# Altium PCB lab1_chernov_usb_i2c.PcbDoc
Units mm, origin at the board's own origin, x right, y up, seen from the top; angles counter-clockwise.
Board outline 48 x 20.07 mm, 4 copper layers (Top Layer, Signal Layer 1, Signal Layer 2, Bottom Layer), stack 1.522 mm thick; 28 components, 27 nets, 91 pads, 53 vias.
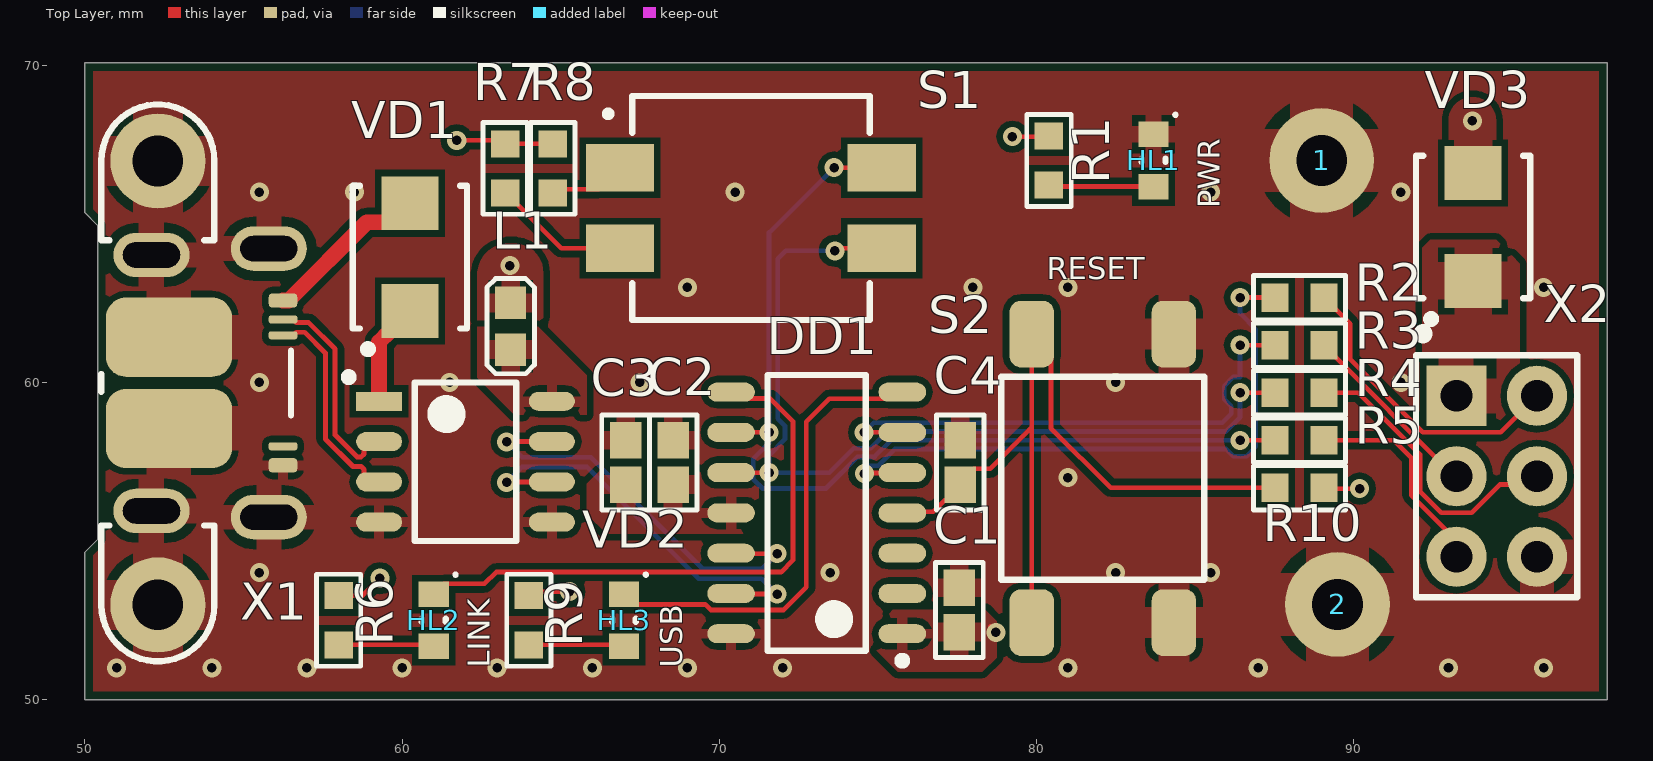
[diagram p0: Top Layer view]
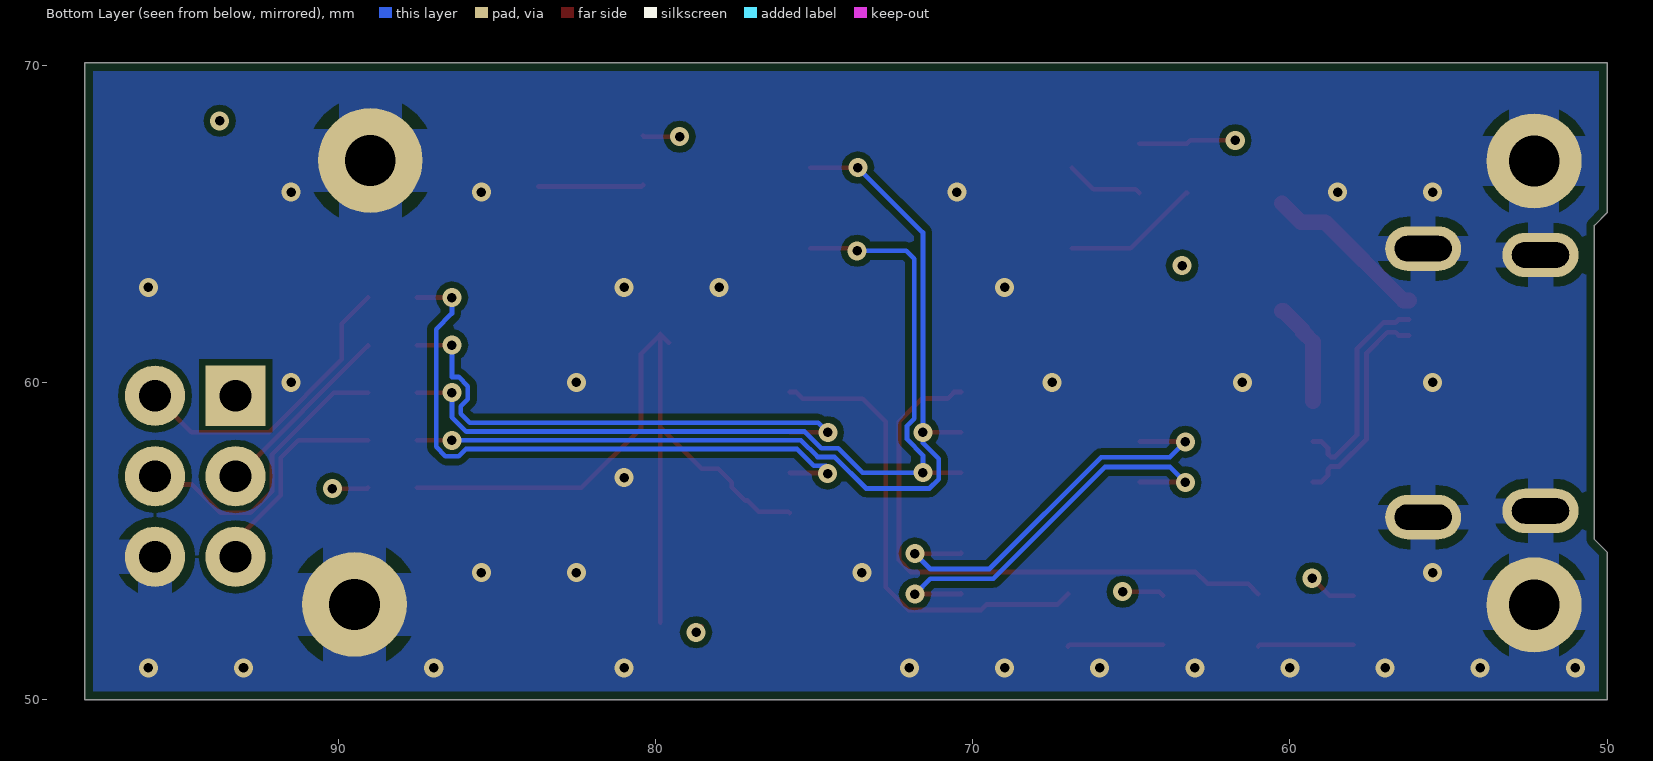
[diagram p1: Bottom Layer view, seen from below]
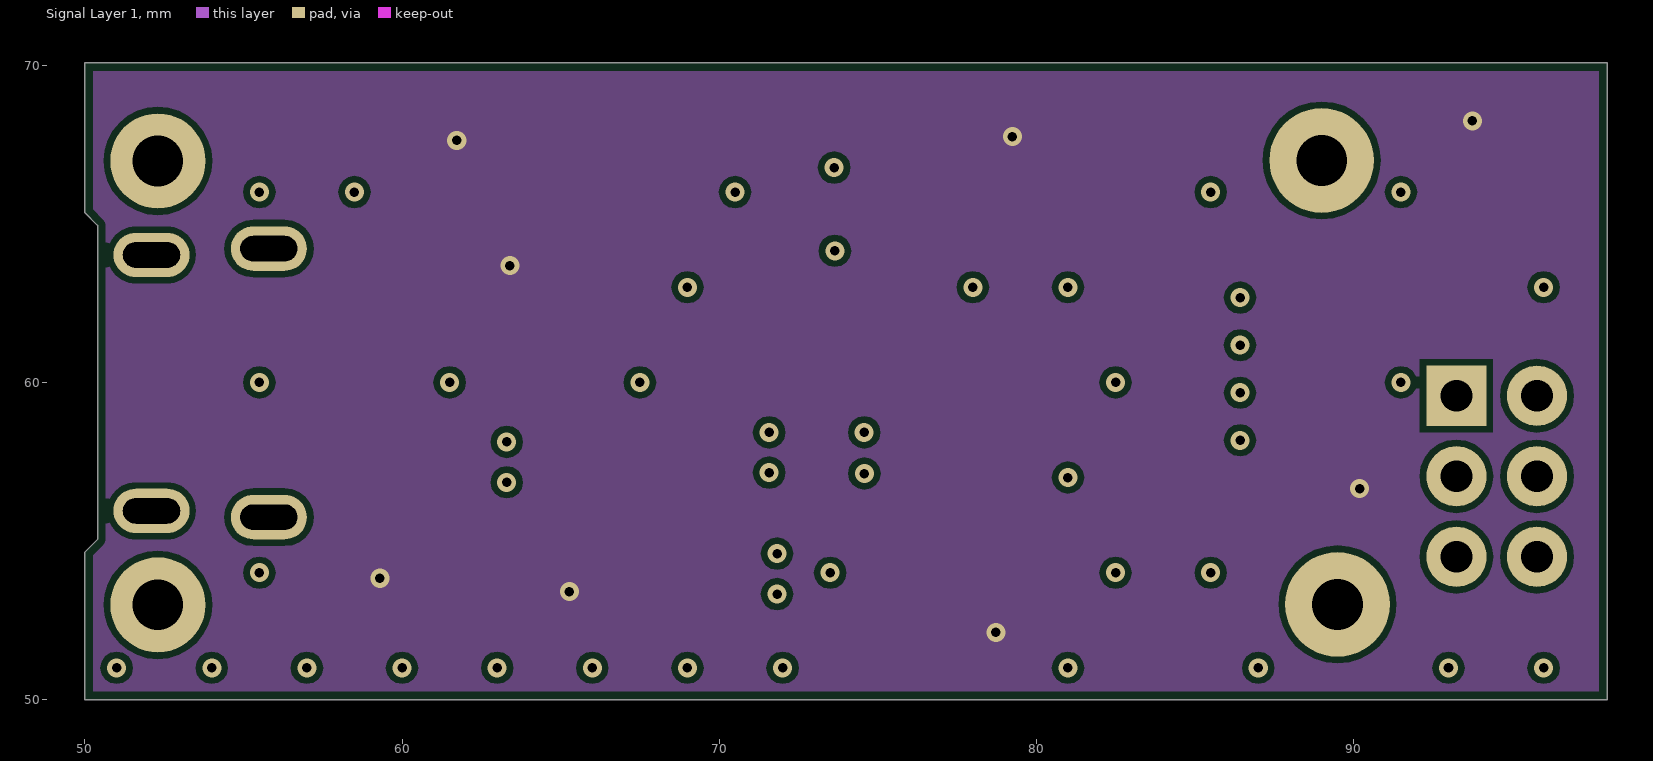
[diagram p2: Signal Layer 1]
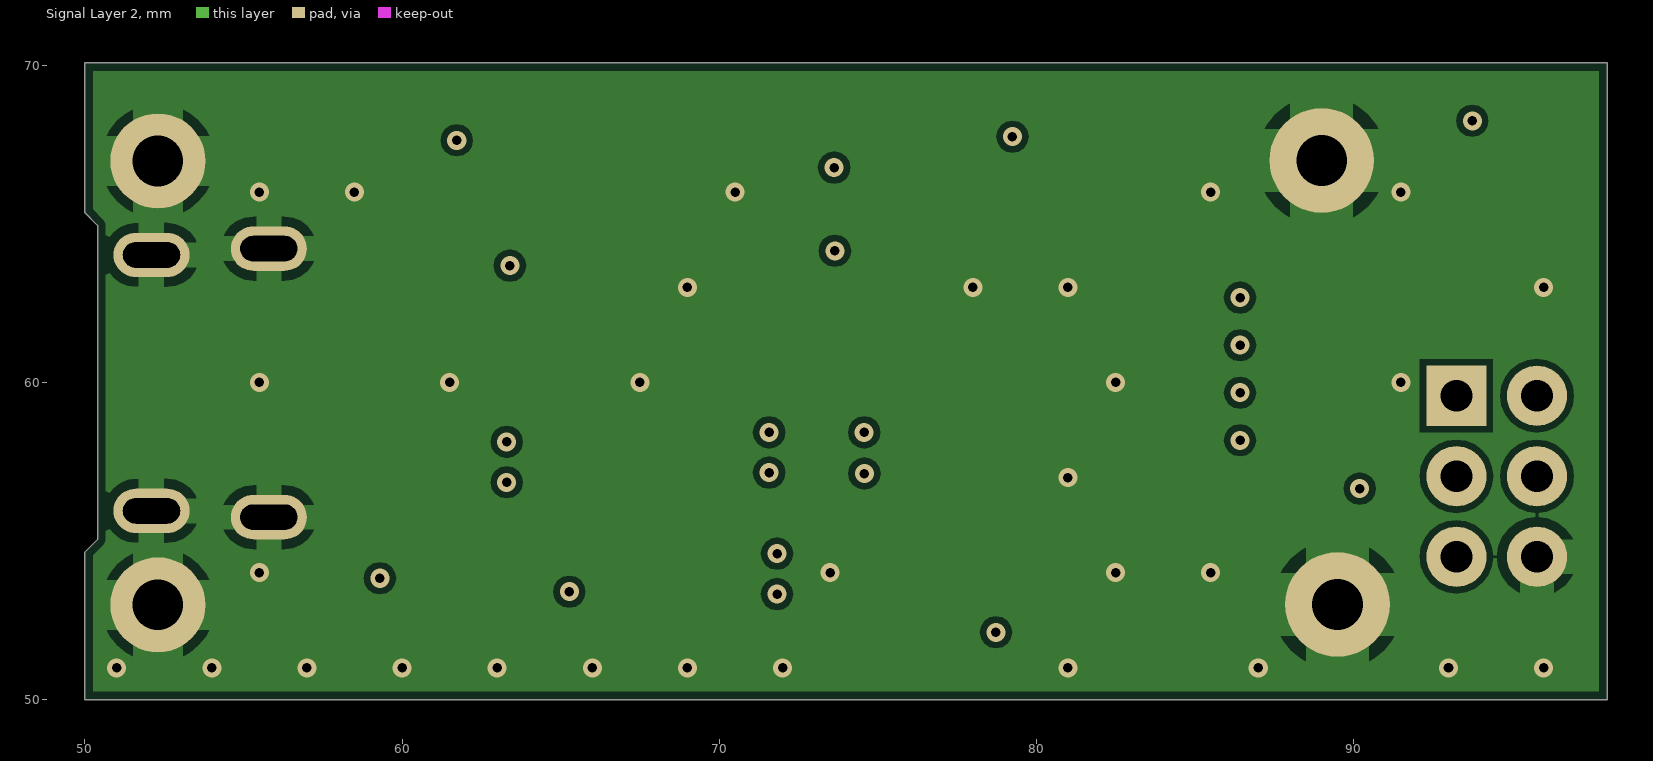
[diagram p3: Signal Layer 2]

## Layer stack, top to bottom
Top Solder: solder mask 0.0102, Solder Resist, Dk 3.5
Top Layer: signal copper 0.018
Prepreg 1: prepreg 0.125, FR4 HiTg170, Dk 5.07
Signal Layer 1: signal copper 0.018
Core 1: core 1.2, FR4, Dk 4.6
Signal Layer 2: signal copper 0.018
Prepreg 2: prepreg 0.125, FR4 HiTg170, Dk 5.07
Bottom Layer: signal copper 0.018
Bottom Solder: solder mask 0.0102, Solder Resist, Dk 3.5

## Board outline
50,54.65 50.4,55.05 50.4,64.95 50,65.35 50,70.075 98,70.075 98,50 50,50

## Design rules (kind name [scope] priority, off if disabled: settings)
AcuteAngle min_acute_angle [OnCopper] p1: minimum=3.50000000000000E+0001 checktracksonly=FALSE // Минимальный угол между примитивами топологии
BoardOutlineClearance board_outline_clearance_std [NOT (OnLayer('Bottom Overlay') OR OnLayer('Top Overlay'))] p1: gap=0.25 ignorepadtopadclearanceinfootprint=FALSE except(0: Arc-SplitContinuation Track-SplitContinuation SMDPad-SplitContinuation THPad-SplitContinuation Via-SplitContinuation Fill-SplitContinuation Poly-SplitContinuation Region-SplitContinuation Text-SplitContinuation) // Отступ элементов топологии от края фрезеруемой печатной платы
Clearance clearance_outer_18um_std [OnTopLayer OR OnBottomLayer] p1: gap=0.125 ignorepadtopadclearanceinfootprint=TRUE except(0.2: Arc-Fill Arc-Poly Track-Fill Track-Poly SMDPad-SMDPad SMDPad-Fill SMDPad-Poly THPad-Fill THPad-Poly Via-Fill Via-Poly Fill-Fill Fill-Poly Poly-Poly Poly-Region Poly-Text; 0.25: Arc-Hole Track-Hole SMDPad-Hole THPad-Hole Via-Hole Fill-Hole Poly-Hole Region-Hole Text-Hole) // Зазоры на внешних слоях
Clearance clearance_inner_18um_std [NOT (OnTopLayer Or OnBottomLayer)] p2: gap=0.125 ignorepadtopadclearanceinfootprint=FALSE except(0.2: Arc-Fill Arc-Poly Track-Fill Track-Poly SMDPad-SMDPad SMDPad-Fill SMDPad-Poly THPad-Fill THPad-Poly Via-Fill Via-Poly Fill-Fill Fill-Poly Poly-Poly Poly-Region Poly-Text; 0.25: Arc-Hole Track-Hole SMDPad-Hole THPad-Hole Via-Hole Fill-Hole Poly-Hole Region-Hole Text-Hole) // Зазоры на внутренних слоях
ComponentClearance [All] p1: gap=0 collisioncheckmode=3 verticalgap=0 showdistances=FALSE
DiffPairsRouting "Schematic Differential Pairs Routing_3" [InNet('CN_D_N')] p1: maxlimit=0.254 minlimit=0.15 mostfreqgap=0.254 toplayer_maxgap=0.15 toplayer_prefgap=0.15 toplayer_minwidth=0.155 toplayer_maxwidth=0.155 toplayer_prefwidth=0.155 bottomlayer_maxgap=0.15 bottomlayer_prefgap=0.15 bottomlayer_minwidth=0.155 bottomlayer_maxwidth=0.155 bottomlayer_prefwidth=0.155 impedanceprofiledriven=TRUE impedanceprofileid={1B1F1868-2FFB-4D51-908A-913D90CA9AFC} impedanceprofilevalue=95.000000 maxuncoupledlength=12.7
DiffPairsRouting "Schematic Differential Pairs Routing_2" [InNet('CN_D_P')] p2: maxlimit=0.254 minlimit=0.15 mostfreqgap=0.254 toplayer_maxgap=0.15 toplayer_prefgap=0.15 toplayer_minwidth=0.155 toplayer_maxwidth=0.155 toplayer_prefwidth=0.155 bottomlayer_maxgap=0.15 bottomlayer_prefgap=0.15 bottomlayer_minwidth=0.155 bottomlayer_maxwidth=0.155 bottomlayer_prefwidth=0.155 impedanceprofiledriven=TRUE impedanceprofileid={1B1F1868-2FFB-4D51-908A-913D90CA9AFC} impedanceprofilevalue=95.000000 maxuncoupledlength=12.7
DiffPairsRouting "Schematic Differential Pairs Routing_1" [InNet('USB_D_N')] p3: maxlimit=0.254 minlimit=0.15 mostfreqgap=0.254 toplayer_maxgap=0.15 toplayer_prefgap=0.15 toplayer_minwidth=0.155 toplayer_maxwidth=0.155 toplayer_prefwidth=0.155 bottomlayer_maxgap=0.15 bottomlayer_prefgap=0.15 bottomlayer_minwidth=0.155 bottomlayer_maxwidth=0.155 bottomlayer_prefwidth=0.155 impedanceprofiledriven=TRUE impedanceprofileid={1B1F1868-2FFB-4D51-908A-913D90CA9AFC} impedanceprofilevalue=95.000000 maxuncoupledlength=12.7
DiffPairsRouting "Schematic Differential Pairs Routing" [InNet('USB_D_P')] p4: maxlimit=0.254 minlimit=0.15 mostfreqgap=0.254 toplayer_maxgap=0.15 toplayer_prefgap=0.15 toplayer_minwidth=0.155 toplayer_maxwidth=0.155 toplayer_prefwidth=0.155 bottomlayer_maxgap=0.15 bottomlayer_prefgap=0.15 bottomlayer_minwidth=0.155 bottomlayer_maxwidth=0.155 bottomlayer_prefwidth=0.155 impedanceprofiledriven=TRUE impedanceprofileid={1B1F1868-2FFB-4D51-908A-913D90CA9AFC} impedanceprofilevalue=95.000000 maxuncoupledlength=12.7
DiffPairsRouting diff_pairs_routing [All] p5: maxlimit=0.254 minlimit=0.127 mostfreqgap=0.254 toplayer_maxgap=0.127 toplayer_prefgap=0.127 toplayer_minwidth=0.143 toplayer_maxwidth=0.143 toplayer_prefwidth=0.143 midlayer1_minwidth=0.381 midlayer1_maxwidth=0.381 midlayer1_prefwidth=0.381 midlayer2_minwidth=0.381 midlayer2_maxwidth=0.381 midlayer2_prefwidth=0.381 bottomlayer_maxgap=0.127 bottomlayer_prefgap=0.127 bottomlayer_minwidth=0.143 bottomlayer_maxwidth=0.143 bottomlayer_prefwidth=0.143 impedanceprofiledriven=TRUE impedanceprofileid={FD46899E-B5A2-4EF5-A302-5D2DB6A51F35} maxuncoupledlength=12.7 // Правила трассировки дифференциальных пар
HoleSize min_hole_size_std [IsPad] p1: absolutevalues=TRUE maxlimit=5.9 minlimit=0.6 maxpercent=80.000 minpercent=20.000 // Диаметр межслойного переходного отверстия
HoleSize min_hole_size_via_std [IsVia] p2: absolutevalues=TRUE maxlimit=5.9 minlimit=0.3 maxpercent=80.000 minpercent=20.000 // Минимальный диаметр монтажного отверстия
HoleToHoleClearance hole_to_hole_clearance_std [All] p1: gap=0.2 allowstackedmicrovias=FALSE // Минимальное расстояние между краями двух отверстий
MinimumAnnularRing min_via_ar_std [All] p1: minimumring=0.15 // Поясок площадки переходного отверстия (Annular ring VIA)
MinimumAnnularRing min_pad_ar_std [All] p2: minimumring=0.2 // Поясок монтажной контактной площадки (Annular ring PAD)
MinimumSolderMaskSliver min_solder_mask_bridge_std [All] p1: minsoldermaskwidth=0.15 // Мнимальная ширина масочного мостика
PlaneClearance plane_clearance_18um_std [All] p1: clearance=0.2 // Отступ полигона (для слоя plane) от элементов топологии
PlaneConnect [All] p1: planeconnectstyle=Relief reliefexpansion=0.5 reliefentries=4 reliefconductorwidth=0.2 reliefairgap=0.2
PolygonConnect poly_connect_to_pad<=0.3 [(AsMM(PadXSize_AllLayers)<=0.301) or (AsMM(PadYSize_AllLayers)<=0.301)] p1: thpad.connectstyle=Relief thpad.reliefconductorwidth=0.2 thpad.reliefentries=4 thpad.polygonreliefangle="90 Angle" thpad.airgapwidth=0.2 smdpad.connectstyle=Relief smdpad.reliefconductorwidth=0.2 smdpad.reliefentries=4 smdpad.polygonreliefangle="90 Angle" smdpad.airgapwidth=0.2 via.connectstyle=Direct via.reliefconductorwidth=0.254 via.reliefentries=4 via.polygonreliefangle="90 Angle" via.airgapwidth=0.254 // Правила подключения полигонов для падов от 0,3мм и меньше
PolygonConnect poly_connect_to_pad<=0.4 [(AsMM(PadXSize_AllLayers)<=0.401) or (AsMM(PadYSize_AllLayers)<=0.401)] p2: thpad.connectstyle=Relief thpad.reliefconductorwidth=0.26 thpad.reliefentries=4 thpad.polygonreliefangle="90 Angle" thpad.airgapwidth=0.2 smdpad.connectstyle=Relief smdpad.reliefconductorwidth=0.26 smdpad.reliefentries=4 smdpad.polygonreliefangle="90 Angle" smdpad.airgapwidth=0.2 via.connectstyle=Direct via.reliefconductorwidth=0.254 via.reliefentries=4 via.polygonreliefangle="90 Angle" via.airgapwidth=0.254 // Правила подключения полигонов для падов от 0,4 и меньше
PolygonConnect poly_connect_to_pad<=0.6 [(AsMM(PadXSize_AllLayers)<=0.601) or (AsMM(PadYSize_AllLayers)<=0.601)] p3: thpad.connectstyle=Relief thpad.reliefconductorwidth=0.33 thpad.reliefentries=4 thpad.polygonreliefangle="90 Angle" thpad.airgapwidth=0.2 smdpad.connectstyle=Relief smdpad.reliefconductorwidth=0.33 smdpad.reliefentries=4 smdpad.polygonreliefangle="90 Angle" smdpad.airgapwidth=0.2 via.connectstyle=Direct via.reliefconductorwidth=0.254 via.reliefentries=4 via.polygonreliefangle="90 Angle" via.airgapwidth=0.254 // Правила подключения полигонов для падов от 0,6мм и меньше
PolygonConnect poly_connect_to_pad<=0.7 [(AsMM(PadXSize_AllLayers)<=0.701) or (AsMM(PadYSize_AllLayers)<=0.701)] p4: thpad.connectstyle=Relief thpad.reliefconductorwidth=0.46 thpad.reliefentries=4 thpad.polygonreliefangle="90 Angle" thpad.airgapwidth=0.2 smdpad.connectstyle=Relief smdpad.reliefconductorwidth=0.46 smdpad.reliefentries=4 smdpad.polygonreliefangle="90 Angle" smdpad.airgapwidth=0.2 via.connectstyle=Direct via.reliefconductorwidth=0.254 via.reliefentries=4 via.polygonreliefangle="90 Angle" via.airgapwidth=0.254 // Правила подключения полигонов для падов от 0,7мм и меньше
PolygonConnect poly_connect_to_pad<=0.8 [(AsMM(PadXSize_AllLayers)<=0.8)or(AsMM(PadYSize_AllLayers)<=0.8)] p5: thpad.connectstyle=Relief thpad.reliefconductorwidth=0.53 thpad.reliefentries=4 thpad.polygonreliefangle="90 Angle" thpad.airgapwidth=0.3 smdpad.connectstyle=Relief smdpad.reliefconductorwidth=0.53 smdpad.reliefentries=4 smdpad.polygonreliefangle="90 Angle" smdpad.airgapwidth=0.2 via.connectstyle=Direct via.reliefconductorwidth=0.254 via.reliefentries=4 via.polygonreliefangle="90 Angle" via.airgapwidth=0.254 // Правила подключения полигонов для падов от 0,8мм и меньше
PolygonConnect poly_connect_to_pad<=1 [(AsMM(PadXSize_AllLayers)<=1.01)or(AsMM(PadYSize_AllLayers)<=1.01)] p6: thpad.connectstyle=Relief thpad.reliefconductorwidth=0.6 thpad.reliefentries=4 thpad.polygonreliefangle="90 Angle" thpad.airgapwidth=0.3 smdpad.connectstyle=Relief smdpad.reliefconductorwidth=0.6 smdpad.reliefentries=4 smdpad.polygonreliefangle="90 Angle" smdpad.airgapwidth=0.2 via.connectstyle=Direct via.reliefconductorwidth=0.254 via.reliefentries=4 via.polygonreliefangle="90 Angle" via.airgapwidth=0.254 // Правила подключения полигонов для падов от 1мм и меньше
PolygonConnect poly_connect_to_pad<=1.3 [(AsMM(PadXSize_AllLayers)<=1.31)or(AsMM(PadYSize_AllLayers)<=1.31)] p7: thpad.connectstyle=Relief thpad.reliefconductorwidth=0.66 thpad.reliefentries=4 thpad.polygonreliefangle="90 Angle" thpad.airgapwidth=0.3 smdpad.connectstyle=Relief smdpad.reliefconductorwidth=0.86 smdpad.reliefentries=4 smdpad.polygonreliefangle="90 Angle" smdpad.airgapwidth=0.2 via.connectstyle=Direct via.reliefconductorwidth=0.254 via.reliefentries=4 via.polygonreliefangle="90 Angle" via.airgapwidth=0.254 // Правила подключения полигонов для падов от 1,3мм и меньше
PolygonConnect poly_connect_to_pad<=1.6 [(AsMM(PadXSize_AllLayers)<=1.61)or(AsMM(PadYSize_AllLayers)<=1.61)] p8: thpad.connectstyle=Relief thpad.reliefconductorwidth=0.8 thpad.reliefentries=4 thpad.polygonreliefangle="90 Angle" thpad.airgapwidth=0.3 smdpad.connectstyle=Relief smdpad.reliefconductorwidth=1 smdpad.reliefentries=4 smdpad.polygonreliefangle="90 Angle" smdpad.airgapwidth=0.2 via.connectstyle=Direct via.reliefconductorwidth=0.254 via.reliefentries=4 via.polygonreliefangle="90 Angle" via.airgapwidth=0.254 // Правила подключения полигонов для падов от 1,6мм и меньше
PolygonConnect poly_connect_to_pad<=1.8 [(AsMM(PadXSize_AllLayers)<=1.8)or(AsMM(PadYSize_AllLayers)<=1.8)] p9: thpad.connectstyle=Relief thpad.reliefconductorwidth=1 thpad.reliefentries=4 thpad.polygonreliefangle="90 Angle" thpad.airgapwidth=0.3 smdpad.connectstyle=Relief smdpad.reliefconductorwidth=1.2 smdpad.reliefentries=4 smdpad.polygonreliefangle="90 Angle" smdpad.airgapwidth=0.2 via.connectstyle=Direct via.reliefconductorwidth=0.254 via.reliefentries=4 via.polygonreliefangle="90 Angle" via.airgapwidth=0.254 // Правила подключения полигонов для падов от 1,8мм и меньше
PolygonConnect poly_connect_to_pad<=2 [(AsMM(PadXSize_AllLayers)<=2.01)or(AsMM(PadYSize_AllLayers)<=2.01)] p10: thpad.connectstyle=Relief thpad.reliefconductorwidth=1.1 thpad.reliefentries=4 thpad.polygonreliefangle="90 Angle" thpad.airgapwidth=0.3 smdpad.connectstyle=Relief smdpad.reliefconductorwidth=1.4 smdpad.reliefentries=4 smdpad.polygonreliefangle="90 Angle" smdpad.airgapwidth=0.2 via.connectstyle=Direct via.reliefconductorwidth=0.254 via.reliefentries=4 via.polygonreliefangle="90 Angle" via.airgapwidth=0.254 // Правила подключения полигонов для падов от 2мм и меньше
PolygonConnect poly_connect_to_pad<=2.3 [(AsMM(PadXSize_AllLayers)<=2.31)or(AsMM(PadYSize_AllLayers)<=2.31)] p11: thpad.connectstyle=Relief thpad.reliefconductorwidth=1.2 thpad.reliefentries=4 thpad.polygonreliefangle="90 Angle" thpad.airgapwidth=0.3 smdpad.connectstyle=Relief smdpad.reliefconductorwidth=1.4 smdpad.reliefentries=4 smdpad.polygonreliefangle="90 Angle" smdpad.airgapwidth=0.2 via.connectstyle=Direct via.reliefconductorwidth=0.254 via.reliefentries=4 via.polygonreliefangle="90 Angle" via.airgapwidth=0.254 // Правила подключения полигонов для падов от 2,3мм и меньше
PolygonConnect poly_connect_to_pad<=2.5 [(AsMM(PadXSize_AllLayers)<=2.51)or(AsMM(PadYSize_AllLayers)<=2.51)] p12: thpad.connectstyle=Relief thpad.reliefconductorwidth=1.2 thpad.reliefentries=4 thpad.polygonreliefangle="90 Angle" thpad.airgapwidth=0.3 smdpad.connectstyle=Relief smdpad.reliefconductorwidth=1.4 smdpad.reliefentries=4 smdpad.polygonreliefangle="90 Angle" smdpad.airgapwidth=0.2 via.connectstyle=Direct via.reliefconductorwidth=0.254 via.reliefentries=4 via.polygonreliefangle="90 Angle" via.airgapwidth=0.254 // Правила подключения полигонов для падов от 2,5мм и меньше
PolygonConnect poly_connect_to_pad<=2.7 [(AsMM(PadXSize_AllLayers)<=2.71)or(AsMM(PadYSize_AllLayers)<=2.71)] p13: thpad.connectstyle=Relief thpad.reliefconductorwidth=1.4 thpad.reliefentries=4 thpad.polygonreliefangle="90 Angle" thpad.airgapwidth=0.3 smdpad.connectstyle=Relief smdpad.reliefconductorwidth=1.6 smdpad.reliefentries=4 smdpad.polygonreliefangle="90 Angle" smdpad.airgapwidth=0.2 via.connectstyle=Direct via.reliefconductorwidth=0.254 via.reliefentries=4 via.polygonreliefangle="90 Angle" via.airgapwidth=0.254 // Правила подключения полигонов для падов от 2,7мм и меньше
PolygonConnect poly_connect_to_pad<=3 [(AsMM(PadXSize_AllLayers)<=3.01)or(AsMM(PadYSize_AllLayers)<=3.01)] p14: thpad.connectstyle=Relief thpad.reliefconductorwidth=1.6 thpad.reliefentries=4 thpad.polygonreliefangle="90 Angle" thpad.airgapwidth=0.3 smdpad.connectstyle=Relief smdpad.reliefconductorwidth=1.8 smdpad.reliefentries=4 smdpad.polygonreliefangle="90 Angle" smdpad.airgapwidth=0.2 via.connectstyle=Direct via.reliefconductorwidth=0.254 via.reliefentries=4 via.polygonreliefangle="90 Angle" via.airgapwidth=0.254 // Правила подключения полигонов для падов от 3мм и меньше
PolygonConnect poly_connect_to_pad<=7 [(AsMM(PadXSize_AllLayers)<7.01)or(AsMM(PadYSize_AllLayers)<=7.01)] p15: thpad.connectstyle=Relief thpad.reliefconductorwidth=2 thpad.reliefentries=4 thpad.polygonreliefangle="90 Angle" thpad.airgapwidth=0.4 smdpad.connectstyle=Relief smdpad.reliefconductorwidth=2 smdpad.reliefentries=4 smdpad.polygonreliefangle="90 Angle" smdpad.airgapwidth=0.3 via.connectstyle=Direct via.reliefconductorwidth=0.254 via.reliefentries=4 via.polygonreliefangle="90 Angle" via.airgapwidth=0.254 // Правила подключения полигонов для падов от 7мм и меньше
PolygonConnect poly_connect_to_pad [All] p16: thpad.connectstyle=Relief thpad.reliefconductorwidth=0.25 thpad.reliefentries=4 thpad.polygonreliefangle="90 Angle" thpad.airgapwidth=0.2 smdpad.connectstyle=Relief smdpad.reliefconductorwidth=0.25 smdpad.reliefentries=4 smdpad.polygonreliefangle="90 Angle" smdpad.airgapwidth=0.2 via.connectstyle=Direct via.reliefconductorwidth=0.25 via.reliefentries=4 via.polygonreliefangle="90 Angle" via.airgapwidth=0.2 // Правила подключения полигонов общие
RoutingCorners [All] p1 off: cornerstyle=45-Degree minsetback=2.5 maxsetback=2.5
RoutingVias [All] p1: holewidth=0.3 width=0.6 viastyle="Through Hole" minholewidth=0.3 minwidth=0.6 maxholewidth=5.9 maxwidth=6.4
SilkToSilkClearance silk_to_silk_clearance_std [All] p1 off: silktosilkclearance=0.15 // Отступ текста шелкографии от других примитивов шелкографии
SilkToSolderMaskClearance silk_to_solder_mask_clearance_std [IsPad] p1 off: minsilkscreentomaskgap=0.15 clearancetoexposedcopper=FALSE // Минимальное расстояние между элементами шелкографии и вскрытой медью
SolderMaskExpansion solder_mask_expansion_std [All] p1: expansion=0.05 // Припуск паяльной масски
UnRoutedNet [All] p1: checkbadconnections=TRUE
Width width_18um_std [All] p1: maxlimit=10 minlimit=0.125 preferedwidth=0.15 checkconnectedcopper=TRUE // Ширина проводников (общая)
19 further rules are at their usual default settings.

## Classes and differential pairs
differential pair class USB_SIGNAL: CN_D USB_D
differential pair USB_D: +USB_D_P -USB_D_N
differential pair CN_D: +CN_D_P -CN_D_N

## Components (designator, comment, footprint, x,y, rotation, side; value= is the part's Value field where it differs from the comment)
1 "MOUNTING_HOLE" HOLE_1,6X3,3 89,67 r90 top
2 "MOUNTING_HOLE" HOLE_1,6X3,3 89.5,53 r90 top
C1 "4,7 мк" C0603 77.575,52.825 r270 top
C2 "2,2 мк" C0603 68.55,57.475 r270 top
C3 "0,22 мк" C0603 67.05,57.475 r270 top
C4 "0,1 мк" C0603 77.6,57.475 r270 top
DD1 "MCP2221-I/SL" SOIC127P600X175-14N 70.375,59.695 r180 top
HL1 "TLMS1000-GS08" HL0603 83.7,67 r270 top
HL2 "TLMO1000-GS08" HL0603 61,52.5 r270 top
HL3 "TLMY1000-GS08" HL0603 67,52.5 r270 top
L1 "BLM18PG221SN1D" BLM-2-0603 63.425,61.775 r270 top
R1 "330" R0603 80.4,67 r270 top
R2 "33" R0603 88.3,62.675 r180 top
R3 "33" R0603 88.3,61.175 r180 top
R4 "33" R0603 88.3,59.675 r180 top
R5 "33" R0603 88.3,58.175 r180 top
R6 "330" R0603 58,52.5 r90 top
R7 "10 к" R0603 63.25,66.75 r90 top
R8 "10 к" R0603 64.75,66.75 r90 top
R9 "330" R0603 64,52.5 r90 top
R10 "10 к" R0603 88.3,56.675 r0 top
S1 "SDA02H1SBD" DIP-SWITCH-02-706X930X545 71,65.5 r0 top
S2 "FSM4JSMA" FSM4JSMA 82.1,56.975 r90 top
VD1 "SL13-E3/5AT" DO-214AC 60.25,63.95 r90 top
VD2 "USB6B1" SO-8 62,57.5 r0 top
VD3 "SL13-E3/5AT" DO-214AC 93.775,64.9 r90 top
X1 "2108877-1" 2108877-1 52.55,59.985 r90 top
X2 "DS1021-2*3SF11" DS1021-2X3SF11 94.52,57.04 r270 top

## Footprints (in the part's own frame and the unit in brackets; to place one, negate y for a bottom-side part, rotate by r counter-clockwise, add the part's x,y. Pads: shape width x height; smd on the part's side, far side on the other; paste and mask are expansions set on the pad)
2108877-1 [mm]
  rrect50% 0.45x0.9 smd: 1(2.6,-3.696) 5(-2.6,-3.696)
  rrect50% 0.25x0.9 smd: 2(2,-3.696) 3(1.5,-3.696) 4(-2,-3.696)
  round 3 hole 1.6: TP1(-7,0.25) TP1(7,0.25)
  oval 1.4x2.4 hole 0.8 slot 1.8 at 90 deg mask+0.102: TP1(-4.235,-3.25) TP1(-4.035,0.45) TP1(4.035,0.45) TP1(4.235,-3.25)
  rrect50% 2.5x3.98 smd: TP1(-1.441,-0.104) TP1(1.441,-0.104)
  silkscreen extent -8.78,-3.95 8.78,2.03, body extent -8.9,-3.95 8.9,3.95, height 3.39
BLM-2-0603 [mm] "Chip Inductor, 2-Leads, Body 1,60x0,80mm, IPC Medium Density"
  rect 1.02x0.98 smd: 1(-0.74,0) 2(0.74,0)
  silkscreen extent -1.5,-0.75 1.5,0.75, body extent -0.8,-0.37 0.8,0.38, height 0.8
C0603 [mm] "Chip Capacitor, 2-Leads, Body 1,60x0,80mm, IPC Medium Density"
  rect 1.15x1 smd: 1(-0.7,0) 2(0.7,0)
  silkscreen extent -1.5,-0.75 1.5,0.75, body extent -0.8,-0.4 0.8,0.4, height 0.8
DIP-SWITCH-02-706X930X545 [mm]
  rect 2.15x1.5 smd: 1(-4.125,-1.27) 2(4.125,-1.27) 3(-4.125,1.27) 4(4.125,1.27)
  silkscreen extent -4.6,-3.53 3.74,3.53, body extent -4.65,-3.53 4.65,3.53, height 5.44
DO-214AC [mm] "Molded Diode, 2-Leads, Body 4,25x2,67mm, IPC Medium Density"
  rect 1.7x1.8 smd: 1(-1.7,0) 2(1.7,0)
  silkscreen extent -3.02,-1.8 2.25,1.8, body extent -2.7,-1.81 2.7,1.81, height 2.43
DS1021-2X3SF11 [mm]
  rect 1.9x1.9 hole 1: 1(-2.54,-1.27)
  round 1.9 hole 1: 2(-2.54,1.27) 3(0,-1.27)
  round 1.9 hole 1 mask+0.102: 4(0,1.27) 5(2.54,-1.27) 6(2.54,1.27)
  silkscreen extent -4.5,-2.55 3.81,2.54, body extent -3.81,-2.54 3.81,2.54, height 8.59
FSM4JSMA [mm]
  rrect50% 2.1x1.4 smd: 1(-4.55,2.24) 1(4.55,2.24) 2(-4.55,-2.24) 2(4.55,-2.24)
  silkscreen extent -3.2,-3.2 3.2,3.2, body extent -5,-3 5,3, height 5.13
HL0603 [mm] "Chip Diode, 2-Leads, Body 1,60x0,80mm, IPC Medium Density"
  rect 0.8x0.95 smd: 1(-0.825,0) 2(0.825,0)
  silkscreen extent -1.49,-0.38 0.05,0.74, body extent -0.81,-0.4 0.81,0.4, height 0.6
HOLE_1,6X3,3 [mm]
  round 3.3 hole 1.6: 1(0,0)
R0603 [mm] "Chip Resistor, 2-Leads, Body 1,60x0,80mm, IPC Medium Density"
  rect 0.85x0.9 smd: 1(-0.775,0) 2(0.775,0)
  silkscreen extent -1.45,-0.7 1.45,0.7, body extent -0.8,-0.4 0.8,0.4, height 0.45
SO-8 [mm] "SOIC, 8-Leads, Body 4,90x3,90mm, Pitch 1,27mm, IPC Medium Density"
  rect 1.45x0.6 smd: 1(-2.725,1.905)
  oval 1.45x0.6 smd: 2(-2.725,0.635) 3(-2.725,-0.635) 4(-2.725,-1.905) 5(2.725,-1.905) 6(2.725,-0.635) 7(2.725,0.635) 8(2.725,1.905)
  silkscreen extent -3.81,-2.5 1.6,2.79, body extent -3.06,-2.47 3.06,2.48, height 1.75
SOIC127P600X175-14N [mm] "SOIC, 14-Leads, Body 8,65x3,90mm, Pitch 1,27mm, IPC Medium Density"
  oval 1.5x0.6 smd: 1(-5.4,7.62) 2(-5.4,6.35) 3(-5.4,5.08) 4(-5.4,3.81) 5(-5.4,2.54) 6(-5.4,1.27) 7(-5.4,0) 8(0,0) 9(0,1.27) 10(0,2.54) 11(0,3.81) 12(0,5.08) 13(0,6.35) 14(0,7.62)
  silkscreen extent -5.53,-0.54 -1.15,8.59, body extent -4.65,-0.54 -0.75,8.16, height 1.75

## Part data
C1: library part c0012, "=Описание", HelpURL=https://www.yageo.com/upload/media/product/productsearch/datasheet/mlcc/UPY-GPHC_X5R_4V-to-50V_26.pdf, ID=c0012, Корпус=0603, Наименование=CC0603KRX5R6BB475, Напряжение="10 В", Номинал="4,7 мк", Номинальное напряжение="10 В", Описание="Конденсатор чип 0603 4,7 мкФ 10 В ±10 %", Отклонение="±10 %", Производитель=Yageo, Рабочие температуры="от -55 °С до +85 °С", Фамилия=Чернов
C2: library part c0009, "=Описание", HelpURL=https://www.yageo.com/upload/media/product/productsearch/datasheet/mlcc/UPY-GPHC_X7R_6.3V-to-50V_20.pdf, ID=c0009, Корпус=0603, Наименование=CC0603KRX7R6BB225, Напряжение="10 В", Номинал="2,2 мк", Номинальное напряжение="10 В", Описание="Конденсатор чип 0603 2,2 мкФ 10 В ±10 %", Отклонение="±10 %", Производитель=Yageo, Рабочие температуры="от -55 °С до +125 °С", Фамилия=Чернов
C3: library part c0006, "=Описание", HelpURL=https://www.yageo.com/upload/media/product/productsearch/datasheet/mlcc/UPY-GPHC_X7R_6.3V-to-50V_20.pdf, ID=c0006, Корпус=0603, Наименование=CC0603JRX7R6BB224, Напряжение="10 В", Номинал="0,22 мк", Номинальное напряжение="10 В", Описание="Конденсатор чип 0603 0,22 мкФ 10 В ±5 %", Отклонение="±5 %", Производитель=Yageo, Рабочие температуры="от -55 °С до +125 °С", Фамилия=Чернов
C4: library part c0005, "=Описание", HelpURL=https://www.yageo.com/upload/media/product/products/datasheet/mlcc/UPY-GPHC_X7R_6.3V-to-50V_20.pdf, ID=c0005, Корпус=0603, Наименование=CC0603JRX7R9BB104, Напряжение="50 В", Номинал="0,1 мк", Номинальное напряжение="50 В", Описание="Конденсатор чип 0603 0,1 мкФ 50 В ±5 %", Отклонение="±5 %", Производитель=Yageo, Рабочие температуры="от -55 °С до +125 °С", Фамилия=Ларионов
HL1: library part hl0001, "=Описание", HelpURL=https://www.vishay.com/leds/list/product-83172/, ID=hl0001, Корпус=0603, Наименование=TLMS1000-GS08, Номинальная длина волны="628 нм", Номинальная сила света="4 мкд", Номинальное падение напряжения="1,8 В", Номинальный прямой ток="15 мА", Описание="Светодиод чип 0603 красный", Производитель="Vishay Intertechnology, Inc.", Рабочие температуры="от -40 °С до +100 °С", Рассеиваемая мощность="40 мВт", Фамилия=Ларионов, Цвет=Red
HL2: library part hl0002, "=Описание", HelpURL=https://www.vishay.com/leds/list/product-83172/, ID=hl0002, Корпус=0603, Наименование=TLMO1000-GS08, Номинальная длина волны="605 нм", Номинальная сила света="7,5 мкд", Номинальное падение напряжения="1,8 В", Номинальный прямой ток="15 мА", Описание="Светодиод чип 0603 светло-оранжевый", Производитель="Vishay Intertechnology, Inc.", Рабочие температуры="от -40 °С до +100 °С", Рассеиваемая мощность="40 мВт", Фамилия=Ларионов, Цвет="Soft orange"
HL3: library part hl0003, "=Описание", HelpURL=https://www.vishay.com/leds/list/product-83172/, ID=hl0003, Корпус=0603, Наименование=TLMY1000-GS08, Номинальная длина волны="588 нм", Номинальная сила света="7,5 мкд", Номинальное падение напряжения="1,8 В", Номинальный прямой ток="15 мА", Описание="Светодиод чип 0603 желтый", Производитель="Vishay Intertechnology, Inc.", Рабочие температуры="от -40 °С до +100 °С", Рассеиваемая мощность="40 мВт", Фамилия=Ларионов, Цвет=Yellow
L1: library part l0002, "=Описание", HelpURL=https://www.murata.com/en-global/products/productdetail?partno=BLM18PG221SN1%23, ID=l0002, Корпус=0603, Наименование=BLM18PG221SN1D, Описание="Ферритовая бусина 220 Ом ±25 %", Отклонение, 100 Мгц="±25 %", Производитель="Murata Manufacturing Co., Ltd.", Рабочие температуры="от -55 °С до +125 °С", Сопротивление, 100 МГц="220 Ом", Сопротивление при постоянном токе="0,1 Ом", Фамилия=Самарин
R1 R6 R9: library part r0009, "=Описание", HelpURL=https://www.yageo.com/upload/media/product/productsearch/datasheet/rchip/PYu-RC_Group_51_RoHS_L_11.pdf, ID=r0009, Корпус=0603, Наименование=RC0603FR-07330RL, Номинал=330, Номинальное напряжение="75 В", Номинальный ток="1 А", Описание="Резистор чип 0603 330 Ом ±1 % 0,1 Вт", Отклонение="±1 %", Производитель=Yageo, Рабочие температуры="от -55 °С до +155 °С", Фамилия=Ларионов
R2 R3 R4 R5: library part r0005, "=Описание", HelpURL=https://www.yageo.com/upload/media/product/productsearch/datasheet/rchip/PYu-AA_51_RoHS_L_3.pdf, ID=r0005, Корпус=0603, Наименование=AA0603FR-0733RL, Номинал=33, Номинальное напряжение="75 В", Номинальный ток="1 А", Описание="Резистор чип 0603 33 Ом ±1 % 0,1 Вт", Отклонение="±1 %", Производитель=Yageo, Рабочие температуры="от -55 °С до +155 °С", Фамилия=Козлов
R7 R8 R10: library part r0012, "=Описание", HelpURL=https://www.yageo.com/upload/media/product/productsearch/datasheet/rchip/PYu-RC_Group_51_RoHS_L_11.pdf, ID=r0012, Корпус=0603, Наименование=RC0603FR-0710KL, Номинал="10 к", Номинальное напряжение="75 В", Номинальный ток="1 А", Описание="Резистор чип 0603 10 кОм ±1 % 0,1 Вт", Отклонение="±1 %", Производитель=Yageo, Рабочие температуры="от -55 °С до +155 °С", Фамилия=Самарин
S1: library part sw0001, "=Описание", HelpURL=https://www.ckswitches.com/products/switches/product-details/DIP/SDA/SDA02H1SBD/, ID=sw0001, Количество контактов=2, Корпус=7,06х9,30х5,45, Наименование=SDA02H1SBD, Описание="2-х позиционный движковый переключатель", Производитель=C&K, Промывка=Разрешена, Рабочие температуры="от -40 °С до +85 °С", Сопротивление контакта="50 мОм", Ток нагрузки="100 мА @ 5 В", Фамилия=Козлов
S2: library part sw0002, "=Описание", HelpURL=https://www.te.com/usa-en/product-4-1437565-1.html, ID=sw0002, Количество контактов=1, Корпус=6,00x6,00x4,98, Наименование=FSM4JSMA, Описание="Тактовая кнопка поверхностного монтажа", Производитель="TE Connectivity", Промывка=Разрешена, Рабочие температуры="от –35 °С до +85 °С", Сопротивление контакта="100 мОм", Ток нагрузки="50 мА @ 24 В", Фамилия=Паньков
VD1 VD3: library part vd0001, "=Описание", HelpURL=https://www.vishay.com/product?docid=88740, ID=vd0001, Импульсное обратное напряжение="30 В", Корпус=DO-214AC, Макс допустимый средний прямой ток="1,5 А", Наименование=SL13-E3/5AT, Описание="Диод Шоттки 30 В 1,5 А", Пиковое прямое напряжение="0,445 В", Производитель="Vishay Intertechnology, Inc.", Рабочие температуры="от -55 °С до +125 °С", Фамилия=Ларионов
VD2: library part vd0005, "=Описание", HelpURL=https://www.st.com/content/st_com/en/products/protection-devices/esd-protection/usb-port-protection/usb6b1.html, ID=vd0005, Корпус=SO-8, Наименование=USB6B1, Описание="Диодная сборка для подавления помех, от 6 В", Производитель=STMicroelectronics, Фамилия=Ларионов
X1: library part x0001, "=Описание", Contact_1=VBUS, Contact_2=D-, Contact_3=D+, Contact_4=ID, Contact_5=GND, HelpURL=https://www.te.com/global-en/product-2108877-1.html, ID=x0001, Наименование=2108877-1, Описание="Micro USB Type B IP68 гнездо", Производитель="TE Connectivity", Фамилия=Ларионов
X2: library part x0003, "=Описание", Contact_1=+5V, Contact_2=URx, Contact_3=UTx, Contact_4=SCL, Contact_5=SDA, Contact_6=GND, HelpURL=http://www.connfly.com/productshow.aspx?id=118, ID=x0003, Наименование=DS1021-2*3SF11, Описание="PLS 3x2 pin 2,54 мм вилка прямой", Производитель="Connfly Electronic Co. LTD", Фамилия=Самарин
1 2: ID=fstn0011, Диаметр отверстия="1,6 мм", Наименование="Отверстие 1,6x3,3", Описание="Отверстие под М1,5", Параметры металлизации="3,3 мм"

## Via types
v1: diameter 0.6, hole 0.3, Top Layer to Bottom Layer, 53 vias

## Nets (pads, with @x,y where several pads share a name; then routed paths per layer and width w, separated by ;. In a path a pad name is that pad's centre, name@x,y a point inside that pad or via, vN(x,y) a via of type N, cw(c..) or ccw(c..) an arc to the next point about the centre after c; other vN are vias at no path point)
+5V: C1.2 DD1.1 L1.1 R1.1 R6.2 R7.2 R8.2 R9.2 R10.2 VD3.2 | length 8.5
  Top Layer w0.15: R6.2 58.75,53.275 v1(59.3,53.825) ; v1(61.725,67.635) 63.14,67.635 R7.2 R8.2 ; R9.2 64.125,53.4 v1(65.275,53.4) ; v1@78.55,52.3 v1(78.729,52.121) ; v1(79.25,67.75) 80.375,67.75 R1.1 ; R10.2 89.1,56.65 v1(90.2,56.65)
  other v1: 63.4,63.685 93.75,68.25
CN_5V_IN: VD1.2 X1.1 | length 5.3
  Top Layer w0.5: X1.1 56.421,62.585 58.886,65.05 59.65,65.05 VD1.2
CN_D_N: VD2.2 X1.2 | length 6.7
  Top Layer w0.155: X1.2 56.571,61.985 56.668,61.888 57.055,61.888 57.888,61.055 57.888,58.344 58.579,57.653 58.708,57.653 58.799,57.743 58.799,57.929 59.004,58.135 VD2.2
CN_D_P: VD2.3 X1.3 | length 6.7
  Top Layer w0.155: X1.3 56.571,61.485 56.668,61.582 56.929,61.582 57.583,60.928 57.583,58.217 58.453,57.347 58.708,57.347 58.799,57.257 58.799,57.071 59.004,56.865 VD2.3
CN_SCL: R4.1 X2.4 | length 9.4
  Top Layer w0.15: R4.1 90.161,59.675 92.1,57.736 92.1,56.564 92.774,55.89 93.726,55.89 94.615,56.779 95.529,56.779 X2.4
CN_SDA: R5.1 X2.5 | length 6.7
  Top Layer w0.15: R5.1 91.272,58.175 91.825,57.622 91.825,56.45 92.915,55.36 92.915,54.835 X2.5
CN_URx: R2.1 X2.2 | length 9.6
  Top Layer w0.15: R2.1 89.9,61.85 89.9,60.725 92.195,58.43 94.64,58.43 X2.2
CN_UTx: R3.1 X2.3 | length 5.9
  Top Layer w0.15: R3.1 89.075,61.15 93.185,57.04 X2.3
GND: 1.1 2.1 C1.1 C2.1 C3.1 C4.1 DD1.14 HL1.1 S2.2 VD2.4 VD2.5 X1.5 X1.TP1 X2.6
  other v1: 51,51 54,51 57,51 60,51 63,51 66,51 69,51 72,51 81,51 87,51 93,51 96,51 55.5,54 73.5,54 82.5,54 85.5,54 81,57 55.5,60 61.5,60 67.5,60 82.5,60 91.5,60 69,63 78,63 81,63 96,63 55.5,66 58.5,66 70.5,66 85.5,66 91.5,66
I2C_LINK: DD1.8 HL2.1 | length 18.5
  Top Layer w0.15: HL2.1 61.322,53.647 62.597,53.647 62.97,54.02 71.955,54.02 72.328,54.392 72.328,58.775 71.613,59.489 70.798,59.489 70.593,59.695 DD1.8
NetC2_2: C2.2 C3.2 DD1.11
NetHL1_2: HL1.2 R1.2 | length 3.3
  Top Layer w0.15: R1.2 80.45,66.175 HL1.2
NetHL2_2: HL2.2 R6.1 | length 3
  Top Layer w0.15: R6.1 60.95,51.725 HL2.2
NetHL3_2: HL3.2 R9.1 | length 3
  Top Layer w0.15: R9.1 HL3.2@66.95,51.725
  Top Layer w0.155: HL3.2@66.95,51.725 HL3.2
NetL1_2: L1.2 VD2.8
NetR7_1: R7.1 S1.1 | length 4.3
  Top Layer w0.15: R7.1 63.275,65.975 65.02,64.23 S1.1
NetR8_1: R8.1 S1.3 | length 2.5
  Top Layer w0.15: R8.1 64.87,66.095 66.2,66.095 S1.3
NetVD1_1: VD1.1 VD2.1 | length 3.3
  Top Layer w0.5: VD2.1 59.275,61.275 59.6,61.6 59.6,61.65 60.2,62.25 VD1.1
NetVD3_1: VD3.1 X2.1
nRST: C4.2 DD1.4 R10.1 S2.1 | length 25.8
  Top Layer w0.15: DD1.4 75.815,55.925 76.75,55.925 77.1,56.275 77.175,56.275 77.6,56.7 C4.2 77.6,56.85 78.025,57.275 78.55,57.275 79.86,58.585 ; S2.1@79.585,61.25 79.86,61.525 S2.1@79.86,61.504 ; S2.1@79.86,52.425 79.86,58.585 ; R10.1 82.35,56.675 80.464,58.561 80.464,60.9 S2.1@79.86,61.504 ; 79.86,58.585 S2.1@79.86,61.504
SCL: DD1.10 R4.2 S1.2 | length 29.2
  Top Layer w0.15: DD1.10 v1(71.575,57.155) ; v1(73.65,64.15) 73.65,64.23 S1.2 ; v1(86.425,59.675) R4.2
  Bottom Layer w0.15: v1(73.65,64.15) 72.1,64.15 71.85,63.9 71.85,58.857 72.075,58.632 72.075,58.218 72.062,58.204 72.075,58.204 71.575,57.704 v1(71.575,57.155) 73.479,57.155 74.249,57.925 74.782,57.925 75.307,58.45 85.975,58.45 86.425,58.9 v1(86.425,59.675)
SDA: DD1.9 R5.2 S1.4 | length 30.8
  Top Layer w0.15: DD1.9 v1(71.575,58.425) ; v1(73.625,66.775) 73.625,66.77 S1.4 ; v1(86.425,58.175) R5.2
  Bottom Layer w0.15: v1(73.625,66.775) 71.575,64.725 v1(71.575,58.425) 71.575,58.093 71.075,57.593 71.075,56.948 71.368,56.655 73.368,56.655 74.363,57.65 74.896,57.65 75.421,58.175 v1(86.425,58.175)
URx: DD1.5 R2.2 | length 20.2
  Top Layer w0.15: v1(74.579,57.128) 74.592,57.141 75.761,57.141 DD1.5 ; v1(86.425,62.675) R2.2
  Bottom Layer w0.15: v1(74.579,57.128) 74.606,57.155 74.606,57.36 74.621,57.375 75.01,57.375 75.535,57.9 85.993,57.9 86.218,57.675 86.632,57.675 86.925,57.968 86.925,61.675 86.425,62.175 v1(86.425,62.675)
USB_CNF: DD1.7 HL3.1 | length 14.9
  Top Layer w0.15: HL3.1 67.325,53 69.563,53 69.738,52.825 72.032,52.825 72.75,53.543 72.75,58.762 73.475,59.487 75.363,59.487 75.571,59.695 DD1.7
USB_D_N: DD1.12 VD2.7 | length 13.3
  Top Layer w0.15: DD1.12@70.375,54.6 v1(71.825,54.6)
  Top Layer w0.155: v1(63.3,58.125) 63.3,58.135 VD2.7 ; DD1.12@70.375,54.6 DD1.12
  Bottom Layer w0.155: v1(63.3,58.125) 63.785,57.64 65.953,57.64 69.478,54.115 71.34,54.115 v1(71.825,54.6)
USB_D_P: DD1.13 VD2.6 | length 13.3
  Top Layer w0.15: DD1.13@70.375,53.325 v1(71.825,53.325)
  Top Layer w0.155: v1(63.3,56.85) 63.3,56.865 VD2.6 ; DD1.13@70.375,53.325 DD1.13
  Bottom Layer w0.155: v1(63.3,56.85) 63.785,57.335 65.826,57.335 69.351,53.81 71.34,53.81 v1(71.825,53.325)
UTx: DD1.6 R3.2 | length 16.7
  Top Layer w0.15: v1(74.575,58.425) DD1.6 ; v1(86.425,61.175) R3.2
  Bottom Layer w0.15: v1(74.575,58.425) 74.875,58.725 85.861,58.725 86.15,59.014 86.15,59.243 85.925,59.468 85.925,59.882 86.218,60.175 86.425,60.175 v1(86.425,61.175)
pads on no net: DD1.2 DD1.3 X1.4

## Polygon pours and split planes (outlines as drawn)
GND on Top Layer "GND_L01_P070" (solid, pour order 70): 43.9,74.3 107.975,74.3 107.975,45.225 43.9,45.225
+5V on Top Layer "+5V_L01_P060" (solid, pour order 60): 74.875,52.225 74.875,51.625 75.625,50.875 78.3,50.875 78.75,51.325 78.75,52.475 78.4,52.825 75.475,52.825
NetVD3_1 on Top Layer "NETVD3_1_L01_P054" (solid, pour order 54): 95.25,63.75 95.25,58.75 92.175,58.75 92.175,64.25 92.425,64.5 94.5,64.5
+5V on Top Layer "+5V_L01_P058" (solid, pour order 58): 93,66.5 93,68.25 cw(c93.75,68.25) 93.75,69 cw(c93.75,68.25) 94.5,68.25 94.5,66.5
NetVD3_1 on Top Layer "NETVD3_1_L01_P056" (solid, pour order 56): 92.25,63.25
NetC2_2 on Top Layer "NETC2_2_L01_P052" (solid, pour order 52): 65.826,56.802 65.826,55.849 66.45,55.225 70.825,55.225 71.25,55.65 71.25,57.325 66.359,57.334
+5V on Top Layer "+5V_L01_P044" (solid, pour order 44): 63.375,64.385 63.525,64.385 cw(c63.525,63.46) 64.45,63.46 64.45,61.775 62.375,61.775 62.375,63.385 cw(c63.375,63.385)
NetL1_2 on Top Layer "NETL1_2_L01_P040" (solid, pour order 40): 63.54,58.985 65.825,58.985 65.825,60.225 64.3,61.75 62.375,61.75 62.375,60.15
NetC2_2 on Top Layer "NETC2_2_L01_P050" (solid, pour order 50): 69.15,57.375
NetL1_2 on Top Layer "NETL1_2_L01_P042" (solid, pour order 42): 77.775,51.45
no net on Top Layer "Top Layer-No Net" (solid, pour order 22): 60.25,60.95
no net on Top Layer "Top Layer-No Net 1" (solid, pour order 20): 60,60
no net on Top Layer "Top Layer-No Net 2" (solid, pour order 4): 64,59.1
no net on Top Layer "Top Layer-No Net 3" (solid, pour order 2): 56.525,62.385
+5V on Signal Layer 1 "+5V_L02_P064" (solid, pour order 64): 43.975,74.05 101.6,74.05 101.6,44.8 44.5,44.8
GND on Signal Layer 2 "GND_L03_P066" (solid, pour order 66): 44.025,74.575 105.875,74.575 105.875,45.125 44.55,45.125
GND on Bottom Layer "GND_L04_P068" (solid, pour order 68): 44.475,74.575 107.35,74.575 107.35,44.975 44.1,44.975

## Other copper
Top Layer:
  pour cut-out: 78.25,51.5
  pour cut-out: 65.95,58.9

## Silkscreen, mask and mechanical layers (free items; w line width, h text height)
Top Overlay:
  text "PWR" at 86.025,65.5 h1.2 r90
  text "RESET" at 80.325,63.025 h1.2
  text "LINK" at 63,51 h1.2 r90
  text "USB" at 69.075,51 h1.2 r90
Board:
  lines w0.1: 50.4,55.05 50,54.65 50,50 98,50 98,70.075 50,70.075 50,65.575 50,65.35 50.4,64.95 ; 50.4,55.05 50.4,55.05 ; 50.4,55.05 50.4,64.95 ; 50.4,64.95 50.4,64.95
Assembly Notes (Mech5):
  text "'.title'" at 50,47.5 h2
  text "'.project'_'.pcb_dec_number'['.Pcb_File_Name_No_Path']" at 50,45 h2